# Altium PCB lab2_samarin_boost.PcbDoc
Units mm, origin at the board's own origin, x right, y up, seen from the top; angles counter-clockwise.
Board outline 33.57 x 44.29 mm, 2 copper layers (Top Layer, Bottom Layer), stack 1.536 mm thick; 24 components, 18 nets, 76 pads, 56 vias.
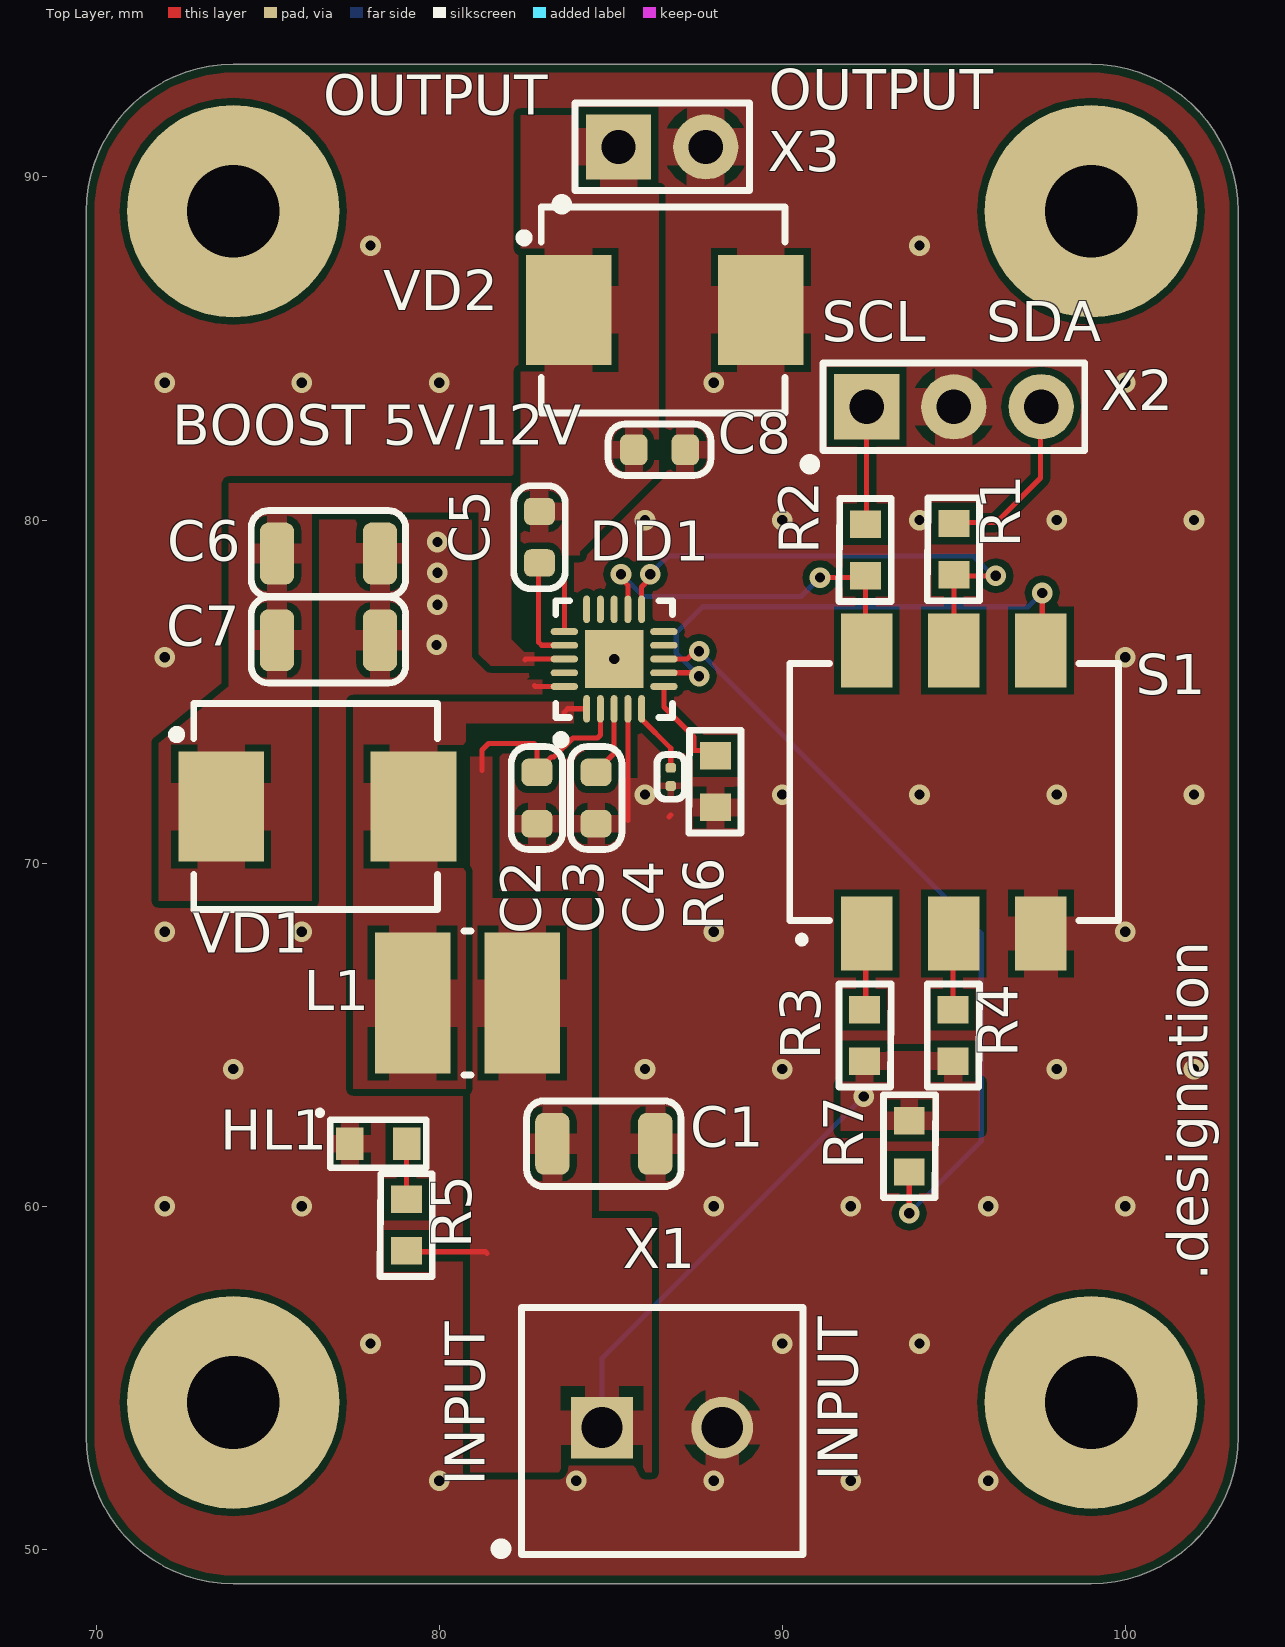
[diagram p0: Top Layer view]
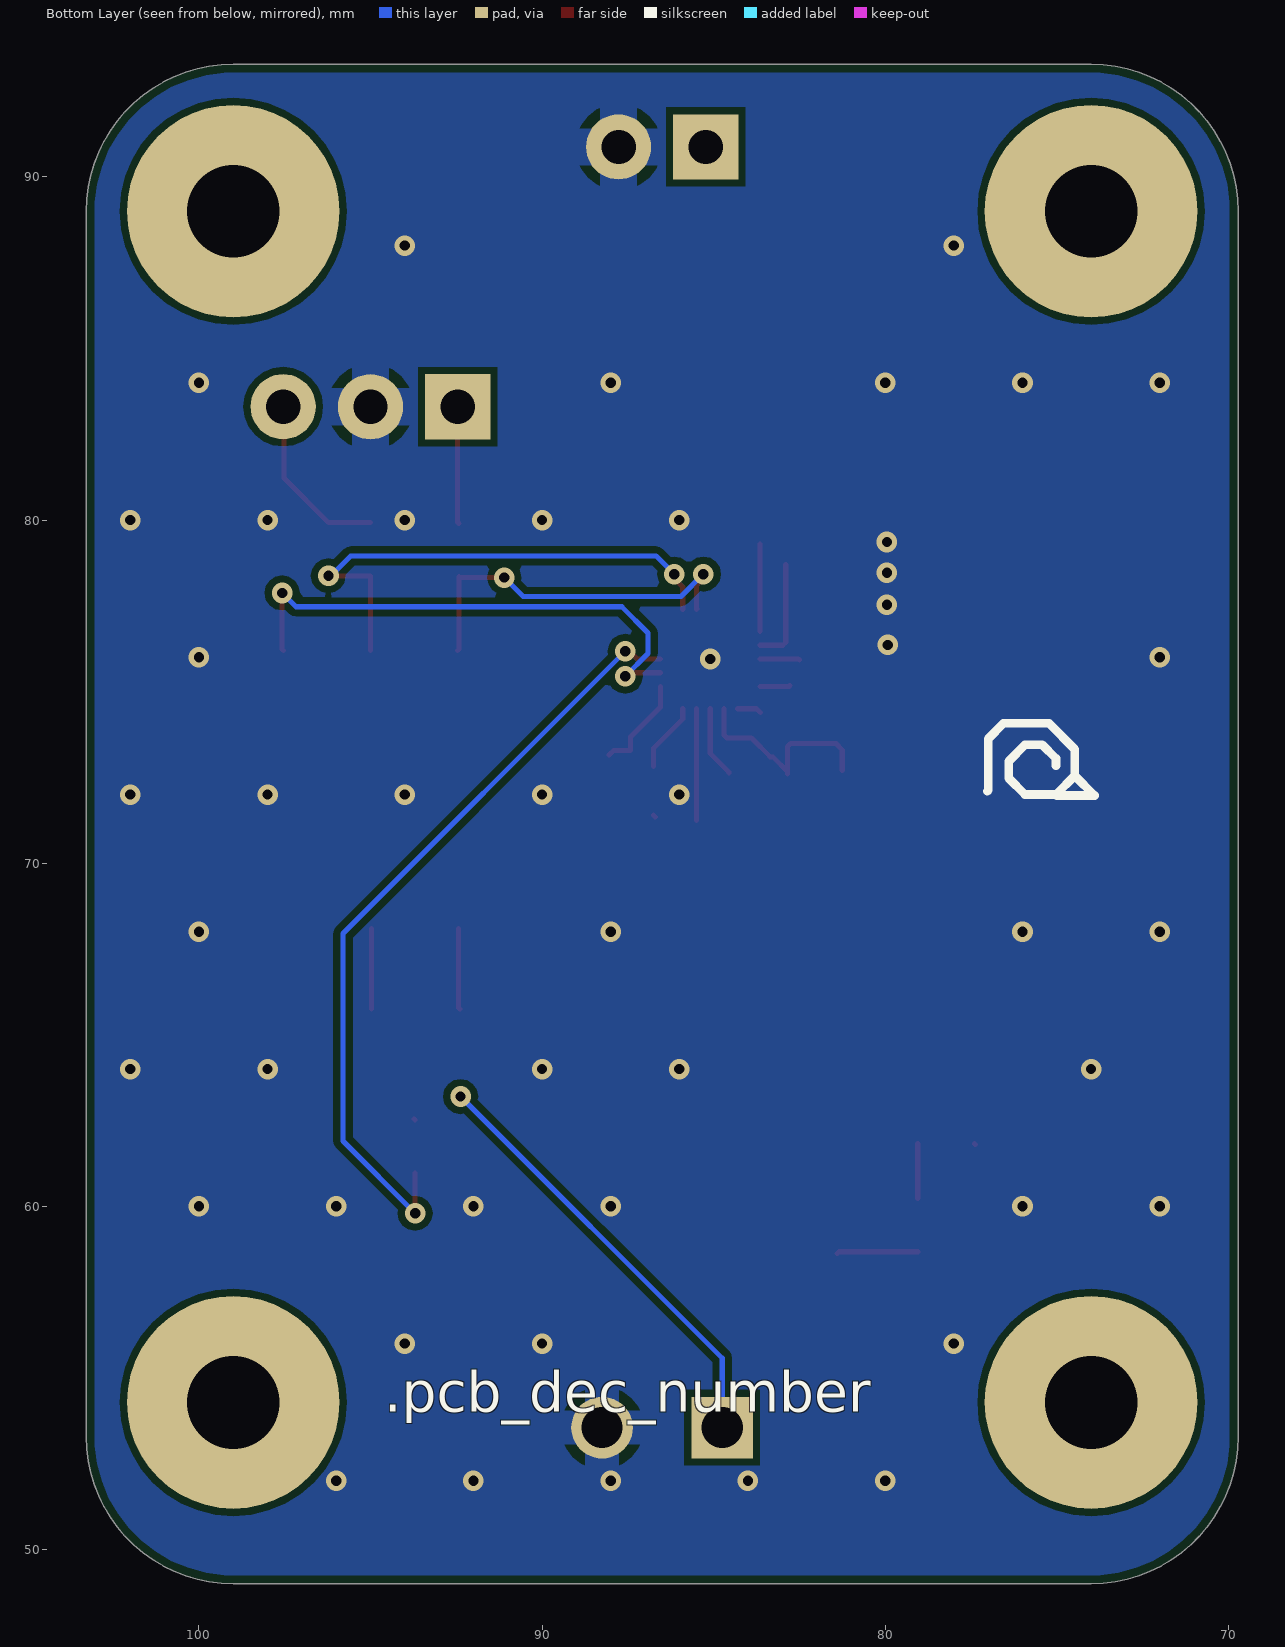
[diagram p1: Bottom Layer view, seen from below]
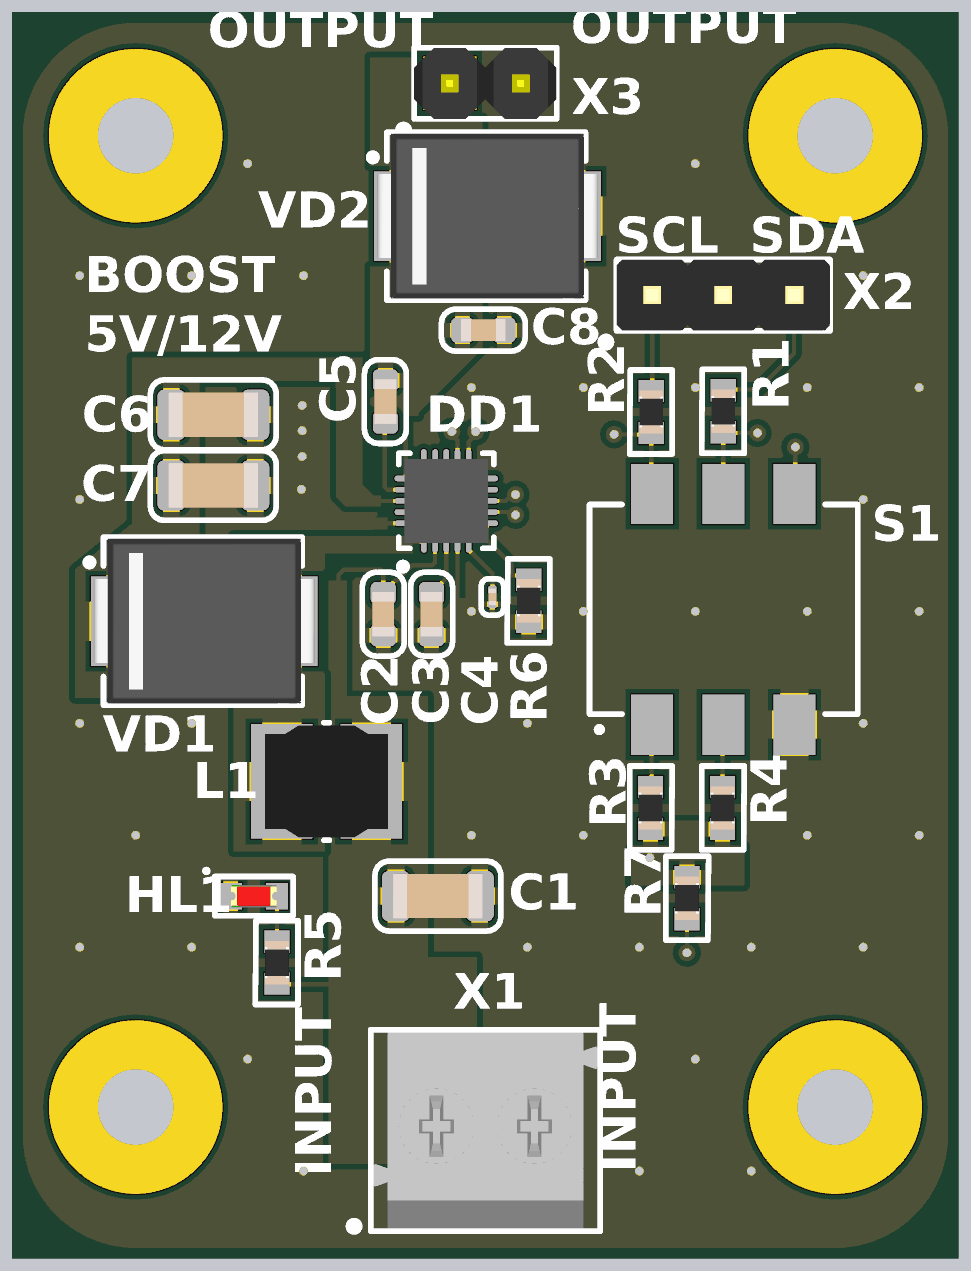
[diagram p2: 3D render of the assembled board from above, using the file's embedded part models]

## Layer stack, top to bottom
Top Solder: solder mask 0.0102, Solder Resist, Dk 3.5
Top Layer: signal copper 0.018
Core 1: core 1.5, FR4, Dk 4.6
Bottom Layer: signal copper 0.018
Bottom Solder: solder mask 0.0102, Solder Resist, Dk 3.5

## Board outline
69.715,53.285 ccw(c74,53.285) 74,49 99,49 ccw(c99,53.285) 103.285,53.285 103.285,89 ccw(c99,89) 99,93.285 74,93.285 ccw(c74,89) 69.715,89

## Design rules (kind name [scope] priority, off if disabled: settings)
AcuteAngle min_acute_angle [OnCopper] p1: minimum=3.50000000000000E+0001 checktracksonly=FALSE // Минимальный угол между примитивами топологии
BoardOutlineClearance board_outline_clearance_std [NOT (OnLayer('Bottom Overlay') OR OnLayer('Top Overlay'))] p1: gap=0.25 ignorepadtopadclearanceinfootprint=FALSE except(0: Arc-SplitContinuation Track-SplitContinuation SMDPad-SplitContinuation THPad-SplitContinuation Via-SplitContinuation Fill-SplitContinuation Poly-SplitContinuation Region-SplitContinuation Text-SplitContinuation) // Отступ элементов топологии от края фрезеруемой печатной платы
Clearance clearance_outer_18um_std [OnTopLayer OR OnBottomLayer] p1: gap=0.125 ignorepadtopadclearanceinfootprint=TRUE except(0.2: Arc-Fill Arc-Poly Track-Fill Track-Poly SMDPad-SMDPad SMDPad-Fill SMDPad-Poly THPad-Fill THPad-Poly Via-Fill Via-Poly Fill-Fill Fill-Poly Poly-Poly Poly-Region Poly-Text; 0.25: Arc-Hole Track-Hole SMDPad-Hole THPad-Hole Via-Hole Fill-Hole Poly-Hole Region-Hole Text-Hole) // Зазоры на внешних слоях
Clearance clearance_inner_18um_std [NOT (OnTopLayer Or OnBottomLayer)] p2: gap=0.125 ignorepadtopadclearanceinfootprint=FALSE except(0.2: Arc-Fill Arc-Poly Track-Fill Track-Poly SMDPad-SMDPad SMDPad-Fill SMDPad-Poly THPad-Fill THPad-Poly Via-Fill Via-Poly Fill-Fill Fill-Poly Poly-Poly Poly-Region Poly-Text; 0.25: Arc-Hole Track-Hole SMDPad-Hole THPad-Hole Via-Hole Fill-Hole Poly-Hole Region-Hole Text-Hole) // Зазоры на внутренних слоях
ComponentClearance [All] p1: gap=0 collisioncheckmode=3 verticalgap=0 showdistances=FALSE
DiffPairsRouting diff_pairs_routing [All] p1: maxlimit=0.127 minlimit=0.127 mostfreqgap=0.127 toplayer_minwidth=0.143 toplayer_maxwidth=0.143 toplayer_prefwidth=0.143 bottomlayer_minwidth=0.143 bottomlayer_maxwidth=0.143 bottomlayer_prefwidth=0.143 impedanceprofiledriven=TRUE impedanceprofileid={FD46899E-B5A2-4EF5-A302-5D2DB6A51F35} maxuncoupledlength=12.7 // Правила трассировки дифференциальных пар
HoleSize min_hole_size_std [IsPad] p1: absolutevalues=TRUE maxlimit=5.9 minlimit=0.6 maxpercent=80.000 minpercent=20.000 // Диаметр межслойного переходного отверстия
HoleSize min_hole_size_via_std [IsVia] p2: absolutevalues=TRUE maxlimit=5.9 minlimit=0.3 maxpercent=80.000 minpercent=20.000 // Минимальный диаметр монтажного отверстия
HoleToHoleClearance hole_to_hole_clearance_std [All] p1: gap=0.2 allowstackedmicrovias=FALSE // Минимальное расстояние между краями двух отверстий
MinimumAnnularRing min_via_ar_std [All] p1: minimumring=0.15 // Поясок площадки переходного отверстия (Annular ring VIA)
MinimumAnnularRing min_pad_ar_std [All] p2: minimumring=0.2 // Поясок монтажной контактной площадки (Annular ring PAD)
MinimumSolderMaskSliver min_solder_mask_bridge_std [All] p1: minsoldermaskwidth=0.15 // Мнимальная ширина масочного мостика
PlaneClearance plane_clearance_18um_std [All] p1: clearance=0.2 // Отступ полигона (для слоя plane) от элементов топологии
PlaneConnect [All] p1: planeconnectstyle=Relief reliefexpansion=0.5 reliefentries=4 reliefconductorwidth=0.2 reliefairgap=0.2
PolygonConnect poly_connect_to_pad<=0.3 [(AsMM(PadXSize_AllLayers)<=0.301) or (AsMM(PadYSize_AllLayers)<=0.301)] p1: thpad.connectstyle=Relief thpad.reliefconductorwidth=0.2 thpad.reliefentries=4 thpad.polygonreliefangle="90 Angle" thpad.airgapwidth=0.2 smdpad.connectstyle=Relief smdpad.reliefconductorwidth=0.2 smdpad.reliefentries=4 smdpad.polygonreliefangle="90 Angle" smdpad.airgapwidth=0.2 via.connectstyle=Direct via.reliefconductorwidth=0.254 via.reliefentries=4 via.polygonreliefangle="90 Angle" via.airgapwidth=0.254 // Правила подключения полигонов для падов от 0,3мм и меньше
PolygonConnect poly_connect_to_pad<=0.4 [(AsMM(PadXSize_AllLayers)<=0.401) or (AsMM(PadYSize_AllLayers)<=0.401)] p2: thpad.connectstyle=Relief thpad.reliefconductorwidth=0.26 thpad.reliefentries=4 thpad.polygonreliefangle="90 Angle" thpad.airgapwidth=0.2 smdpad.connectstyle=Relief smdpad.reliefconductorwidth=0.26 smdpad.reliefentries=4 smdpad.polygonreliefangle="90 Angle" smdpad.airgapwidth=0.2 via.connectstyle=Direct via.reliefconductorwidth=0.254 via.reliefentries=4 via.polygonreliefangle="90 Angle" via.airgapwidth=0.254 // Правила подключения полигонов для падов от 0,4 и меньше
PolygonConnect poly_connect_to_pad<=0.6 [(AsMM(PadXSize_AllLayers)<=0.601) or (AsMM(PadYSize_AllLayers)<=0.601)] p3: thpad.connectstyle=Relief thpad.reliefconductorwidth=0.33 thpad.reliefentries=4 thpad.polygonreliefangle="90 Angle" thpad.airgapwidth=0.2 smdpad.connectstyle=Relief smdpad.reliefconductorwidth=0.33 smdpad.reliefentries=4 smdpad.polygonreliefangle="90 Angle" smdpad.airgapwidth=0.2 via.connectstyle=Direct via.reliefconductorwidth=0.254 via.reliefentries=4 via.polygonreliefangle="90 Angle" via.airgapwidth=0.254 // Правила подключения полигонов для падов от 0,6мм и меньше
PolygonConnect poly_connect_to_pad<=0.7 [(AsMM(PadXSize_AllLayers)<=0.701) or (AsMM(PadYSize_AllLayers)<=0.701)] p4: thpad.connectstyle=Relief thpad.reliefconductorwidth=0.46 thpad.reliefentries=4 thpad.polygonreliefangle="90 Angle" thpad.airgapwidth=0.2 smdpad.connectstyle=Relief smdpad.reliefconductorwidth=0.46 smdpad.reliefentries=4 smdpad.polygonreliefangle="90 Angle" smdpad.airgapwidth=0.2 via.connectstyle=Direct via.reliefconductorwidth=0.254 via.reliefentries=4 via.polygonreliefangle="90 Angle" via.airgapwidth=0.254 // Правила подключения полигонов для падов от 0,7мм и меньше
PolygonConnect poly_connect_to_pad<=0.8 [(AsMM(PadXSize_AllLayers)<=0.8)or(AsMM(PadYSize_AllLayers)<=0.8)] p5: thpad.connectstyle=Relief thpad.reliefconductorwidth=0.53 thpad.reliefentries=4 thpad.polygonreliefangle="90 Angle" thpad.airgapwidth=0.3 smdpad.connectstyle=Relief smdpad.reliefconductorwidth=0.53 smdpad.reliefentries=4 smdpad.polygonreliefangle="90 Angle" smdpad.airgapwidth=0.2 via.connectstyle=Direct via.reliefconductorwidth=0.254 via.reliefentries=4 via.polygonreliefangle="90 Angle" via.airgapwidth=0.254 // Правила подключения полигонов для падов от 0,8мм и меньше
PolygonConnect poly_connect_to_pad<=1 [(AsMM(PadXSize_AllLayers)<=1.01)or(AsMM(PadYSize_AllLayers)<=1.01)] p6: thpad.connectstyle=Relief thpad.reliefconductorwidth=0.6 thpad.reliefentries=4 thpad.polygonreliefangle="90 Angle" thpad.airgapwidth=0.3 smdpad.connectstyle=Relief smdpad.reliefconductorwidth=0.6 smdpad.reliefentries=4 smdpad.polygonreliefangle="90 Angle" smdpad.airgapwidth=0.2 via.connectstyle=Direct via.reliefconductorwidth=0.254 via.reliefentries=4 via.polygonreliefangle="90 Angle" via.airgapwidth=0.254 // Правила подключения полигонов для падов от 1мм и меньше
PolygonConnect poly_connect_to_pad<=1.3 [(AsMM(PadXSize_AllLayers)<=1.31)or(AsMM(PadYSize_AllLayers)<=1.31)] p7: thpad.connectstyle=Relief thpad.reliefconductorwidth=0.66 thpad.reliefentries=4 thpad.polygonreliefangle="90 Angle" thpad.airgapwidth=0.3 smdpad.connectstyle=Relief smdpad.reliefconductorwidth=0.86 smdpad.reliefentries=4 smdpad.polygonreliefangle="90 Angle" smdpad.airgapwidth=0.2 via.connectstyle=Direct via.reliefconductorwidth=0.254 via.reliefentries=4 via.polygonreliefangle="90 Angle" via.airgapwidth=0.254 // Правила подключения полигонов для падов от 1,3мм и меньше
PolygonConnect poly_connect_to_pad<=1.6 [(AsMM(PadXSize_AllLayers)<=1.61)or(AsMM(PadYSize_AllLayers)<=1.61)] p8: thpad.connectstyle=Relief thpad.reliefconductorwidth=0.8 thpad.reliefentries=4 thpad.polygonreliefangle="90 Angle" thpad.airgapwidth=0.3 smdpad.connectstyle=Relief smdpad.reliefconductorwidth=1 smdpad.reliefentries=4 smdpad.polygonreliefangle="90 Angle" smdpad.airgapwidth=0.2 via.connectstyle=Direct via.reliefconductorwidth=0.254 via.reliefentries=4 via.polygonreliefangle="90 Angle" via.airgapwidth=0.254 // Правила подключения полигонов для падов от 1,6мм и меньше
PolygonConnect poly_connect_to_pad<=1.8 [(AsMM(PadXSize_AllLayers)<=1.8)or(AsMM(PadYSize_AllLayers)<=1.8)] p9: thpad.connectstyle=Relief thpad.reliefconductorwidth=1 thpad.reliefentries=4 thpad.polygonreliefangle="90 Angle" thpad.airgapwidth=0.3 smdpad.connectstyle=Relief smdpad.reliefconductorwidth=1.2 smdpad.reliefentries=4 smdpad.polygonreliefangle="90 Angle" smdpad.airgapwidth=0.2 via.connectstyle=Direct via.reliefconductorwidth=0.254 via.reliefentries=4 via.polygonreliefangle="90 Angle" via.airgapwidth=0.254 // Правила подключения полигонов для падов от 1,8мм и меньше
PolygonConnect poly_connect_to_pad<=2 [(AsMM(PadXSize_AllLayers)<=2.01)or(AsMM(PadYSize_AllLayers)<=2.01)] p10: thpad.connectstyle=Relief thpad.reliefconductorwidth=1.1 thpad.reliefentries=4 thpad.polygonreliefangle="90 Angle" thpad.airgapwidth=0.3 smdpad.connectstyle=Relief smdpad.reliefconductorwidth=1.4 smdpad.reliefentries=4 smdpad.polygonreliefangle="90 Angle" smdpad.airgapwidth=0.2 via.connectstyle=Direct via.reliefconductorwidth=0.254 via.reliefentries=4 via.polygonreliefangle="90 Angle" via.airgapwidth=0.254 // Правила подключения полигонов для падов от 2мм и меньше
PolygonConnect poly_connect_to_pad<=2.3 [(AsMM(PadXSize_AllLayers)<=2.31)or(AsMM(PadYSize_AllLayers)<=2.31)] p11: thpad.connectstyle=Relief thpad.reliefconductorwidth=1.2 thpad.reliefentries=4 thpad.polygonreliefangle="90 Angle" thpad.airgapwidth=0.3 smdpad.connectstyle=Relief smdpad.reliefconductorwidth=1.4 smdpad.reliefentries=4 smdpad.polygonreliefangle="90 Angle" smdpad.airgapwidth=0.2 via.connectstyle=Direct via.reliefconductorwidth=0.254 via.reliefentries=4 via.polygonreliefangle="90 Angle" via.airgapwidth=0.254 // Правила подключения полигонов для падов от 2,3мм и меньше
PolygonConnect poly_connect_to_pad<=2.5 [(AsMM(PadXSize_AllLayers)<=2.51)or(AsMM(PadYSize_AllLayers)<=2.51)] p12: thpad.connectstyle=Relief thpad.reliefconductorwidth=1.2 thpad.reliefentries=4 thpad.polygonreliefangle="90 Angle" thpad.airgapwidth=0.3 smdpad.connectstyle=Relief smdpad.reliefconductorwidth=1.4 smdpad.reliefentries=4 smdpad.polygonreliefangle="90 Angle" smdpad.airgapwidth=0.2 via.connectstyle=Direct via.reliefconductorwidth=0.254 via.reliefentries=4 via.polygonreliefangle="90 Angle" via.airgapwidth=0.254 // Правила подключения полигонов для падов от 2,5мм и меньше
PolygonConnect poly_connect_to_pad<=2.7 [(AsMM(PadXSize_AllLayers)<=2.71)or(AsMM(PadYSize_AllLayers)<=2.71)] p13: thpad.connectstyle=Relief thpad.reliefconductorwidth=1.4 thpad.reliefentries=4 thpad.polygonreliefangle="90 Angle" thpad.airgapwidth=0.3 smdpad.connectstyle=Relief smdpad.reliefconductorwidth=1.6 smdpad.reliefentries=4 smdpad.polygonreliefangle="90 Angle" smdpad.airgapwidth=0.2 via.connectstyle=Direct via.reliefconductorwidth=0.254 via.reliefentries=4 via.polygonreliefangle="90 Angle" via.airgapwidth=0.254 // Правила подключения полигонов для падов от 2,7мм и меньше
PolygonConnect poly_connect_to_pad<=3 [(AsMM(PadXSize_AllLayers)<=3.01)or(AsMM(PadYSize_AllLayers)<=3.01)] p14: thpad.connectstyle=Relief thpad.reliefconductorwidth=1.6 thpad.reliefentries=4 thpad.polygonreliefangle="90 Angle" thpad.airgapwidth=0.3 smdpad.connectstyle=Relief smdpad.reliefconductorwidth=1.8 smdpad.reliefentries=4 smdpad.polygonreliefangle="90 Angle" smdpad.airgapwidth=0.2 via.connectstyle=Direct via.reliefconductorwidth=0.254 via.reliefentries=4 via.polygonreliefangle="90 Angle" via.airgapwidth=0.254 // Правила подключения полигонов для падов от 3мм и меньше
PolygonConnect poly_connect_to_pad<=7 [(AsMM(PadXSize_AllLayers)<7.01)or(AsMM(PadYSize_AllLayers)<=7.01)] p15: thpad.connectstyle=Relief thpad.reliefconductorwidth=2 thpad.reliefentries=4 thpad.polygonreliefangle="90 Angle" thpad.airgapwidth=0.4 smdpad.connectstyle=Relief smdpad.reliefconductorwidth=2 smdpad.reliefentries=4 smdpad.polygonreliefangle="90 Angle" smdpad.airgapwidth=0.3 via.connectstyle=Direct via.reliefconductorwidth=0.254 via.reliefentries=4 via.polygonreliefangle="90 Angle" via.airgapwidth=0.254 // Правила подключения полигонов для падов от 7мм и меньше
PolygonConnect poly_connect_to_pad [All] p16: thpad.connectstyle=Relief thpad.reliefconductorwidth=0.25 thpad.reliefentries=4 thpad.polygonreliefangle="90 Angle" thpad.airgapwidth=0.2 smdpad.connectstyle=Relief smdpad.reliefconductorwidth=0.25 smdpad.reliefentries=4 smdpad.polygonreliefangle="90 Angle" smdpad.airgapwidth=0.2 via.connectstyle=Direct via.reliefconductorwidth=0.25 via.reliefentries=4 via.polygonreliefangle="90 Angle" via.airgapwidth=0.2 // Правила подключения полигонов общие
RoutingCorners [All] p1 off: cornerstyle=45-Degree minsetback=2.5 maxsetback=2.5
RoutingVias [All] p1: holewidth=0.3 width=0.6 viastyle="Through Hole" minholewidth=0.3 minwidth=0.6 maxholewidth=5.9 maxwidth=6.4
SilkToSilkClearance silk_to_silk_clearance_std [All] p1 off: silktosilkclearance=0.15 // Отступ текста шелкографии от других примитивов шелкографии
SilkToSolderMaskClearance silk_to_solder_mask_clearance_std [IsPad] p1 off: minsilkscreentomaskgap=0.15 clearancetoexposedcopper=FALSE // Минимальное расстояние между элементами шелкографии и вскрытой медью
SolderMaskExpansion solder_mask_expansion_std [All] p1: expansion=0.05 // Припуск паяльной масски
UnRoutedNet [All] p1: checkbadconnections=TRUE
Width width_18um_std [All] p1: maxlimit=10 minlimit=0.125 preferedwidth=0.15 checkconnectedcopper=TRUE // Ширина проводников (общая)
19 further rules are at their usual default settings.

## Components (designator, comment, footprint, x,y, rotation, side; value= is the part's Value field where it differs from the comment)
C1 "10 мк" C1206 84.8,61.825 r0 top
C2 "1 мк" C0603 82.85,71.9 r270 top
C3 "1 мк" C0603 84.575,71.9 r270 top
C4 "0,022 мк" C0201 86.75,72.515 r270 top
C5 "0,1 мк" C0603 82.925,79.5 r270 top
C6 "10 мк" C1206 76.775,79.025 r0 top
C7 "10 мк" C1206 76.775,76.5 r0 top
C8 "0,1 мк" C0603 86.425,82.05 r0 top
DD1 "TPS65235RUKR" QFN-20 85.1,75.95 r90 top
HL1 "TLMY1000-GS08" HL0603 78.225,61.825 r0 top
L1 "SRN4018TA-100M" SRN-2-400X400X180 80.825,65.925 r180 top
R1 "33" R0603 95,79.15 r270 top
R2 "33" R0603 92.425,79.125 r270 top
R3 "10 к" R0603 92.4,64.975 r90 top
R4 "10 к" R0603 94.975,64.975 r90 top
R5 "510" R0603 79.05,59.45 r270 top
R6 "280 к" R0603 88.05,72.375 r270 top
R7 "10 к" R0603 93.7,61.75 r90 top
S1 "SDA03H1SBD" DIP-SWITCH-03 95,72.075 r90 top
VD1 "SS36-E3/57T" DO-214AB 76.45,71.65 r0 top
VD2 "SS36-E3/57T" DO-214AB 86.575,86.125 r0 top
X1 "1776275-2" 1776275-2 86.5,53.45 r0 top
X2 "DS1021-3*1SF11" pls-2,54-3 95,83.3 r0 top
X3 "DS1021-2*1SF11" pls-2,54 86.5,90.875 r0 top

## Footprints (in the part's own frame and the unit in brackets; to place one, negate y for a bottom-side part, rotate by r counter-clockwise, add the part's x,y. Pads: shape width x height; smd on the part's side, far side on the other; paste and mask are expansions set on the pad)
1776275-2 [mm] "PCB Terminal Blocks, Header, Wire-to-Board, 2 Position, 3.5mm [.138in] Centerline, 1 Row, Side Wire Entry Angle, 26 – 18AWG Wire Size"
  rect 1.8x1.8 hole 1.2: 1(-1.75,0.1)
  round 1.8 hole 1.2: 2(1.75,0.1)
  silkscreen extent -4.7,-3.6 4.1,3.6, body extent -4,-3.5 4,3.5, height 8.3
C0201 [mm] "Chip Capacitor, 2-Leads, Body 0,60x0,30mm, IPC Medium Density"
  rrect50% 0.28x0.3 smd: 1(-0.265,0) 2(0.265,0)
  silkscreen extent -0.65,-0.4 0.65,0.4, body extent -0.3,-0.15 0.3,0.15, height 0.29
C0603 [mm] "Chip Capacitor, 2-Leads, Body 1,60x0,80mm, IPC Medium Density"
  rrect50% 0.8x0.9 smd: 1(-0.75,0) 2(0.75,0)
  silkscreen extent -1.5,-0.75 1.5,0.75, body extent -0.8,-0.4 0.8,0.4, height 0.8
C1206 [mm] "Chip Capacitor, 2-Leads, Body 3,20x1,60mm, IPC Medium Density"
  rrect50% 1x1.8 smd: 1(-1.5,0) 2(1.5,0)
  silkscreen extent -2.25,-1.25 2.25,1.25, body extent -1.6,-0.8 1.6,0.8, height 0.78
DIP-SWITCH-03 [mm]
  rect 2.15x1.5 smd: 1(-4.125,-2.54) 2(4.125,-2.54) 3(-4.125,0) 4(4.125,0) 5(-4.125,2.54) 6(4.125,2.54)
  silkscreen extent -4.4,-4.8 3.75,4.78, body extent -4.65,-4.8 4.65,4.8, height 5.5
DO-214AB [mm] "Molded Diode, 2-Leads, Body 7,94x5,91mm, IPC Medium Density"
  rect 2.5x3.2 smd: 1(-2.8,0) 2(2.8,0)
  silkscreen extent -4.22,-3 3.5,3, body extent -3.95,-2.95 3.95,2.95, height 2.59
HL0603 [mm] "Chip Diode, 2-Leads, Body 1,60x0,80mm, IPC Medium Density"
  rect 0.8x0.95 smd: 1(-0.825,0) 2(0.825,0)
  silkscreen extent -1.75,-0.7 1.4,0.95, body extent -0.81,-0.4 0.81,0.4, height 0.6
pls-2,54 [mm] "PLS-2"
  rect 1.9x1.9 hole 1: 1(-1.27,0)
  round 1.9 hole 1: 2(1.27,0)
  silkscreen extent -2.93,-1.68 2.54,1.27, body extent -2.55,-1.28 2.53,1.26, height 8.54
pls-2,54-3 [mm] "PLS-3"
  rect 1.9x1.9 hole 1: 1(-2.54,0)
  round 1.9 hole 1: 2(0,0) 3(2.545,0.005)
  silkscreen extent -4.2,-1.68 3.82,1.28, body extent -3.81,-1.27 3.81,1.27, height 8.59
QFN-20 [mm] "QFN, 20-Leads, Body 3,00x3,00mm, Pitch 0,40mm, Thermal Pad 1,85x1,85mm, IPC Medium Density"
  rect 1.7x1.7 smd: 0(0,0)
  oval 0.8x0.2 smd: 1(-1.45,0.8) 2(-1.45,0.4) 3(-1.45,0) 4(-1.45,-0.4) 5(-1.45,-0.8) 11(1.45,-0.8) 12(1.45,-0.4) 13(1.45,0) 14(1.45,0.4) 15(1.45,0.8)
  oval 0.2x0.8 smd: 6(-0.8,-1.45) 7(-0.4,-1.45) 8(0,-1.45) 9(0.4,-1.45) 10(0.8,-1.45) 16(0.8,1.45) 17(0.4,1.45) 18(0,1.45) 19(-0.4,1.45) 20(-0.8,1.45)
  silkscreen extent -2.47,-1.7 1.7,1.7, body extent -1.5,-1.5 1.5,1.5, height 0.8
R0603 [mm] "Chip Resistor, 2-Leads, Body 1,60x0,80mm, IPC Medium Density"
  rect 0.8x0.9 smd: 1(-0.75,0) 2(0.75,0)
  silkscreen extent -1.5,-0.77 1.5,0.75, body extent -0.77,-0.43 0.78,0.43, height 0.43
SRN-2-400X400X180 [mm] "Precision Wire Wound Inductor, 2-Leads, Body 4,00x4,00mm, IPC Medium Density"
  rect 2.2x4.1 smd: 1(-1.6,0) 2(1.6,0)
  silkscreen extent -0.1,-2.1 0.1,2.1, body extent -2.2,-2 2.2,2, height 1.8

## Part data
C1 C6 C7: library part c0094, "=Описание", HelpURL=https://www.yageo.com/upload/media/product/productsearch/datasheet/mlcc/UPY-GPHC_X5R_4V-to-50V_26.pdf, ID=c0094, Корпус=1206, Наименование=CC1206KKX5R9BB106, Напряжение="50 В", Номинал="10 мк", Номинальное напряжение="50 В", Описание="Конденсатор чип 1206 10 мкФ 50 В ±10 %", Отклонение="±10 %", Производитель="YAGEO Corp.", Рабочие температуры="от –55 °С до +85 °С", Температурный коэффициент емкости=X5R, Фамилия=Самарин
C2 C3: library part c0023, "=Описание", HelpURL=https://www.yageo.com/upload/media/product/productsearch/datasheet/mlcc/UPY-GPHC_X5R_4V-to-50V_26.pdf, ID=c0023, Корпус=0603, Наименование=CC0603KPX5R9BB105, Напряжение="50 В", Номинал="1 мк", Номинальное напряжение="50 В", Описание="Конденсатор чип 0603 1 мкФ 50 В ±10 %", Отклонение="±10 %", Производитель="YAGEO Corp.", Рабочие температуры="от -55 °С до +125 °С", Фамилия=Самарин
C4: library part c0015, "=Описание", HelpURL=https://www.yageo.com/upload/media/product/productsearch/datasheet/mlcc/UPY-GPHC_X5R_4V-to-50V_26.pdf, ID=c0015, Корпус=0201, Наименование=CC0201KRX5R7BB223, Напряжение="16 В", Номинал="0,022 мк", Номинальное напряжение="16 В", Описание="Конденсатор чип 0201 0,022 мкФ 16 В ±10 %", Отклонение="±10 %", Производитель="YAGEO Corp.", Рабочие температуры="от -55 °С до +85 °С", Фамилия=Жернаков
C5 C8: library part c0018, "=Описание", HelpURL=https://www.yageo.com/upload/media/product/products/datasheet/mlcc/UPY-GPHC_X7R_6.3V-to-50V_20.pdf, ID=c0018, Корпус=0603, Наименование=CC0603JRX7R9BB104, Напряжение="50 В", Номинал="0,1 мк", Номинальное напряжение="50 В", Описание="Конденсатор чип 0603 0,1 мкФ 50 В ±5 %", Отклонение="±5 %", Производитель="YAGEO Corp.", Рабочие температуры="от -55 °С до +125 °С", Фамилия=Ларионов
DD1: library part dd0005, "=Описание", HelpURL=https://www.ti.com/product/TPS65235, ID=dd0005, Входное напряжение="от 4,5 В до 20 В", Выходное напряжение="от 11 В до 20 В", Коммутируемый ток="до 1 А", Корпус=QFN-20, Наименование=TPS65235RUKR, Описание="Повышающий преобразователь напряжения 20 В и 3 А", Производитель="Texas Instruments", Рабочие температуры="от -40 °С до +85 °С", Фамилия=Самарин, Частота переключения="до 1 МГц"
HL1: library part hl0003, "=Описание", HelpURL=https://www.vishay.com/leds/list/product-83172/, ID=hl0003, Корпус=0603, Наименование=TLMY1000-GS08, Номинальная длина волны="588 нм", Номинальная сила света="7,5 мкд", Номинальное падение напряжения="1,8 В", Номинальный прямой ток="15 мА", Описание="Светодиод чип 0603 желтый", Производитель="Vishay Intertechnology, Inc.", Рабочие температуры="от -40 °С до +100 °С", Рассеиваемая мощность="40 мВт", Фамилия=Ларионов, Цвет=Yellow
L1: library part l0003, "=Описание", HelpURL=https://www.bourns.com/products/magnetic-products/power-inductors-aec-q200-compliant/product/SRN4018TA, ID=l0003, Индуктивность="10 мкГн", Корпус="4,0 x 4,0 x 1,8", Максимальное активное сопротивление="не указано", Наименование=SRN4018TA-100M, Номинал="10 мкГн", Номинальное активное сопротивление="150 мОм", Номинальный ток (при нагреве на 20 °С/40 °С)="1,5 А", Описание="Катушка индуктивности 10 мкГн ±20 %", Отклонение="±20 %", Производитель="Bourns, Inc.", Рабочее напряжение="не указано", Рабочие температуры="от –55 °С до +125 °С", Резонансная частота="35 МГц", Ток насыщения="1,5 А", Фамилия=Самарин
R1 R2: library part r0005, "=Описание", HelpURL=https://www.yageo.com/upload/media/product/productsearch/datasheet/rchip/PYu-AA_51_RoHS_L_3.pdf, ID=r0005, Корпус=0603, Наименование=AA0603FR-0733RL, Номинал=33, Номинальное напряжение="75 В", Номинальный ток="1 А", Описание="Резистор чип 0603 33 Ом ±1 % 0,1 Вт", Отклонение="±1 %", Производитель="YAGEO Corp.", Рабочие температуры="от -55 °С до +155 °С", Фамилия=Козлов
R3 R4 R7: library part r0022, "=Описание", HelpURL=https://www.yageo.com/upload/media/product/productsearch/datasheet/rchip/PYu-RC_Group_51_RoHS_L_11.pdf, ID=r0022, Корпус=0603, Наименование=RC0603FR-0710KL, Номинал="10 к", Номинальное напряжение="75 В", Номинальный ток="1 А", Описание="Резистор чип 0603 10 кОм ±1 % 0,1 Вт", Отклонение="±1 %", Производитель="YAGEO Corp.", Рабочие температуры="от -55 °С до +155 °С", Фамилия=Самарин
R5: library part r0011, "=Описание", HelpURL=https://www.yageo.com/upload/media/product/productsearch/datasheet/rchip/PYu-RC_Group_51_RoHS_L_11.pdf, ID=r0011, Корпус=0603, Наименование=RC0603FR-07510RL, Номинал=510, Номинальное напряжение="75 В", Номинальный ток="1 А", Описание="Резистор чип 0603 510 Ом ±1 % 0,1 Вт", Отклонение="±1 %", Производитель="YAGEO Corp.", Рабочие температуры="от -55 °С до +155 °С", Фамилия=Самарин
R6: library part r0040, "=Описание", HelpURL=https://www.yageo.com/upload/media/product/productsearch/datasheet/rchip/PYu-RC_Group_51_RoHS_L_11.pdf, ID=r0040, Корпус=0603, Наименование=RC0603FR-07280KL, Номинал="280 к", Номинальное напряжение="75 В", Номинальный ток="1 А", Описание="Резистор чип 0603 280 кОм ±1 % 0,1 Вт", Отклонение="±1 %", Производитель="YAGEO Corp.", Рабочие температуры="от -55 °С до +155 °С", Фамилия=Паньков
S1: library part sw0003, "=Описание", HelpURL=https://www.ckswitches.com/products/switches/product-details/DIP/SDA/SDA02H1SBD/, ID=sw0003, Количество контактов=3, Корпус=7,06х9,30х5,45, Наименование=SDA03H1SBD, Описание="3-х позиционный движковый переключатель", Производитель=C&K, Промывка=Разрешена, Рабочие температуры="от -40 °С до +85 °С", Сопротивление контакта="50 мОм", Ток нагрузки="100 мА @ 5 В", Фамилия=Самарин
VD1 VD2: library part vd0004, "=Описание", HelpURL=https://www.vishay.com/product?docid=88751, ID=vd0004, Импульсное обратное напряжение="60 В", Корпус=DO-214AB, Макс допустимый средний прямой ток="3 А", Наименование=SS36-E3/57T, Описание="Диод Шоттки 60 В 3 А", Пиковое прямое напряжение="0,75 В", Производитель="Vishay Intertechnology, Inc.", Рабочие температуры="от –55 °С до +150 °С", Фамилия=Жернаков
X1: library part x0005, "=Описание", Contact_1=VOUT, Contact_2=GND, HelpURL=https://www.te.com/usa-en/product-1776275-2.html, ID=x0005, Наименование=1776275-2, Описание="Клеммная колодка 2 pin 3,5 мм", Производитель="TE Connectivity", Фамилия=Паньков
X2: library part HEADER-3_PLG, Contact_1=SDA, Contact_2=GND, Contact_3=SCL
X3: library part HEADER-2_PLG, Contact_1=VOUT, Contact_2=GND

## Free pads (board coordinates)
  round 6.2 hole 2.7: 2(74,54.285) 2(74,89) 2(99,54.285) 2(99,89)

## Via types
v1: diameter 0.6, hole 0.3, Top Layer to Bottom Layer, tented both sides, 55 vias
v2: diameter 0.6, hole 0.3, Top Layer to Bottom Layer, 1 vias

## Nets (pads, with @x,y where several pads share a name; then routed paths per layer and width w, separated by ;. In a path a pad name is that pad's centre, name@x,y a point inside that pad or via, vN(x,y) a via of type N, cw(c..) or ccw(c..) an arc to the next point about the centre after c; other vN are vias at no path point)
0V_IN: C1.2 C2.2 C3.2 C4.2 C6.2 C7.2 C8.2 DD1.0 DD1.4 DD1.20 HL1.1 R6.2 S1.1 VD2.2 X1.2 X2.2 X3.2 | length 4.2
  Top Layer w0.15: HL1.1@77.375,61.8 HL1.1 ; 82.775,75.175 82.8,75.15 DD1.20 ; 85.5,71.25 DD1.4 ; 86.7,71.35 86.75,71.4
  other v1: 80,52 84,52 88,52 92,52 96,52 78,56 90,56 94,56 72,60 76,60 88,60 92,60 96,60 100,60 74,64 86,64 90,64 98,64 102,64 72,68 76,68 88,68 100,68 86,72 90,72 94,72 98,72 102,72 72,76 100,76 79.925,76.361 79.95,77.536 79.95,78.461 79.95,79.361 86,80 90,80 94,80 98,80 102,80 72,84 76,84 80,84 88,84 100,84 78,88 94,88
  other v2: 85.1,75.95
+VIN: C1.1 C2.1 DD1.2 L1.1 R3.1 R4.1 R5.2 R7.2 X1.1 | length 21.4
  Top Layer w0.15: R5.2@79.05,58.675 81.35,58.675 81.4,58.625 ; 81.25,72.7 81.25,73.3 81.438,73.488 82.762,73.488 82.85,73.4 C2.1@82.85,72.675 ; C2.1@82.85,72.6 C2.1@82.85,72.675 ; DD1.2 84.7,73.738 84.612,73.65 83.9,73.65 83.35,73.1 83.275,73.1 C2.1@82.85,72.675 ; R7.2@93.7,62.525 R7.2@93.725,62.55
  Bottom Layer w0.15: X1.1 84.75,55.575 v1(92.375,63.2)
+VOUT: C5.1 C8.1 DD1.16 VD2.1 X3.1 | length 2.5
  Top Layer w0.15: DD1.16 83.65,79.3
EN: DD1.7 S1.2 | length 15.4
  Top Layer w0.15: DD1.7 87.353,75.55 87.453,75.45 v1(87.575,75.45) ; S1.2 97.575,76.235 v1(97.575,77.875)
  Bottom Layer w0.15: v1(87.575,75.45) 86.912,76.113 86.912,76.712 87.675,77.475 97.175,77.475 v1(97.575,77.875)
NetC3_1: C3.1 DD1.3 | length 2.1
  Top Layer w0.15: C3.1@84.55,72.625 84.55,72.65 85.1,73.2 DD1.3
NetC4_1: C4.1 DD1.5 | length 2
  Top Layer w0.15: DD1.5 85.9,74.2 86.75,73.35 C4.1@86.75,72.825
NetC5_2: C5.2 DD1.17 | length 3
  Top Layer w0.15: C5.2@82.9,78.7 82.9,76.438 82.988,76.35 DD1.17
NetC6_1: C6.1 C7.1 DD1.18 VD1.1 | length 1.2
  Top Layer w0.15: 82.5,75.925 82.525,75.95 DD1.18
NetDD1_1: DD1.1 L1.2 VD1.2 | length 0.7
  Top Layer w0.15: 83.638,74.387 83.75,74.5 DD1.1
NetDD1_6: DD1.6 R6.1 | length 2.9
  Top Layer w0.15: DD1.6 86.55,74.55 87.425,73.675 87.425,73.288 87.912,73.288 R6.1@88.05,73.15
NetDD1_8: DD1.8 R7.1 | length 22.9
  Top Layer w0.15: DD1.8 87.228,75.95 87.453,76.175 v1(87.575,76.175) ; v1(93.7,59.8) R7.1@93.7,60.975
  Bottom Layer w0.15: v1(87.575,76.175) 95.8,67.95 95.8,61.9 v1(93.7,59.8)
NetHL1_2: HL1.2 R5.1 | length 1.6
  Top Layer w0.15: R5.1@79.05,60.225 HL1.2
NetR1_1: R1.1 X2.3 | length 5.2
  Top Layer w0.15: R1.1@95,79.925 96.225,79.925 97.525,81.225 97.525,83.285 X2.3
NetR2_1: R2.1 X2.1 | length 3.4
  Top Layer w0.15: R2.1@92.425,79.9 92.46,79.935 X2.1
NetR3_2: R3.2 S1.5 | length 2.4
  Top Layer w0.15: R3.2@92.4,65.75 92.435,65.785 S1.5@92.435,68.1
NetR4_2: R4.2 S1.3 | length 2.4
  Top Layer w0.15: R4.2@94.975,65.75 S1.3@94.975,68.1
SCL: DD1.12 R2.2 S1.6 | length 11
  Top Layer w0.15: v1(85.3,78.425) 85.3,78.303 85.5,78.103 DD1.12 DD1.12@85.49,77.41 ; v1(91.1,78.325) 92.4,78.325 92.425,78.35 92.425,76.235 S1.6
  Bottom Layer w0.15: v1(85.3,78.425) 85.95,77.775 90.55,77.775 v1(91.1,78.325) v1@91.1,78.203
SDA: DD1.11 R1.2 S1.4 | length 15.1
  Top Layer w0.15: DD1.11 85.9,78.053 86.15,78.303 v1(86.15,78.425) ; S1.4 95,78.375 v1(96.225,78.375)
  Bottom Layer w0.15: v1(86.15,78.425) 86.675,78.95 95.575,78.95 96.15,78.375 v1(96.225,78.375)
pads on no net: DD1.9 DD1.10 DD1.13 DD1.14 DD1.15 DD1.19

## Polygon pours and split planes (outlines as drawn)
0V_IN on Top Layer "Top Layer-0V_IN" (solid, pour order 48): 67.5,96.225 67.575,96.15 67.575,48.575 104.7,48.575 104.7,95.95
0V_IN on Top Layer "Top Layer-0V_IN 1" (solid, pour order 32): 90.95,91.775 86.575,91.775 86.575,81.225 91,81.225 91,89.475 90.95,89.525
+VOUT on Top Layer "Top Layer-+VOUT" (solid, pour order 28): 82.375,91.8 86.4,91.8 86.4,81.375 84.1,79.075 84.1,78.975 82.375,78.975
NetC6_1 on Top Layer "NETC6_1_L01_P026" (solid, pour order 26): 71.825,73.5 73.875,75.15 73.875,81.075 82.1,81.075 82.1,76.525 82.475,76.15 82.775,76.15 82.775,75.75 81.5,75.75 81.15,76.1 81.15,80.225 78,80.225 76.288,80.225 76.288,68.9 71.825,68.9
NetDD1_1 on Top Layer "NETDD1_1_L01_P022" (solid, pour order 22): 83.918,74.7 77.5,74.7 77.5,63.675 77.5,63.425 80.775,63.425 80.775,74.075 80.9,74.075 83.918,74.075
+VIN on Top Layer "Top Layer-+VIN" (solid, pour order 46): 86.2,52.25 86.2,59.65 84.55,59.65 84.45,59.65 84.45,60 84.45,68.975 81.55,68.975 81.55,73.1 80.9,73.1 80.9,52.25
0V_IN on Top Layer "0V_IN_L01_P016" (solid, pour order 16): 76.95,79.975 80.95,79.975 80.95,75.625 81.225,75.35 83,75.35 83,74.925 80.8,74.925 80.35,75.375 76.95,75.375
+VIN on Top Layer "Top Layer-+VIN 1" (solid, pour order 36): 91.7,64.525 95.75,64.525 95.75,62.2 91.7,62.2
0V_IN on Top Layer "0V_IN_L01_P018" (solid, pour order 18): 81.9,72.462 81.9,69.65 88.6,69.65 88.6,72.484
no net on Top Layer "Top Layer-No Net" (solid, pour order 30): 91.075,87.825
no net on Top Layer "NONET_L01_P020" (solid, pour order 20): 89.6,71.075
no net on Top Layer "NONET_L01_P002" (solid, pour order 2): 89.4,73.625
0V_IN on Bottom Layer "Bottom Layer-0V_IN" (solid, pour order 42): 68.225,97.475 104.625,97.475 104.625,47.975 104.15,47.5 68.3,47.5

## Silkscreen, mask and mechanical layers (free items; w line width, h text height)
Top Overlay:
  text "OUTPUT" at 89.6,91.575 h2
  text "OUTPUT" at 76.625,91.425 h2
  text "SCL" at 91.15,84.825 h2
  text "SDA" at 95.95,84.825 h2
  text "BOOST 5V/12V" at 72.225,81.8 h2
  text ".designation" at 102.8,57.825 h2 r90
  text "INPUT" at 92.6,52 h2 r90
  text "INPUT" at 81.725,51.85 h2 r90
Bottom Overlay:
  lines w0.254: 75,71.975 73.9,71.975 74.475,72.55 ; 75.025,72.85 75.025,73.05 75.425,73.45 75.925,73.45 76.4,72.975 76.4,72.475 75.925,72 75.025,72 74.475,72.55 ; 77.025,72.1 77,72.125 77,73.625 76.55,74.075 75.225,74.075 74.475,73.325 74.475,72.55
  text ".pcb_dec_number" at 94.6,53.625 h2
Board:
  the board outline again, w0.254
Assembly Notes (Mech5):
  text "'.title'" at 50,47.5 h2
  text "'.project'_'.pcb_dec_number'['.Pcb_File_Name_No_Path']" at 50,45 h2